# Altium PCB STM32H743IIT6.PcbDoc
Units mm, origin at the board's own origin, x right, y up, seen from the top; angles counter-clockwise.
Board outline 85.01 x 56 mm, 4 copper layers (Top Layer, Layer 2, Layer 3, Bottom Layer), stack 1.603 mm thick; 88 components, 0 nets, 618 pads, 4 vias.
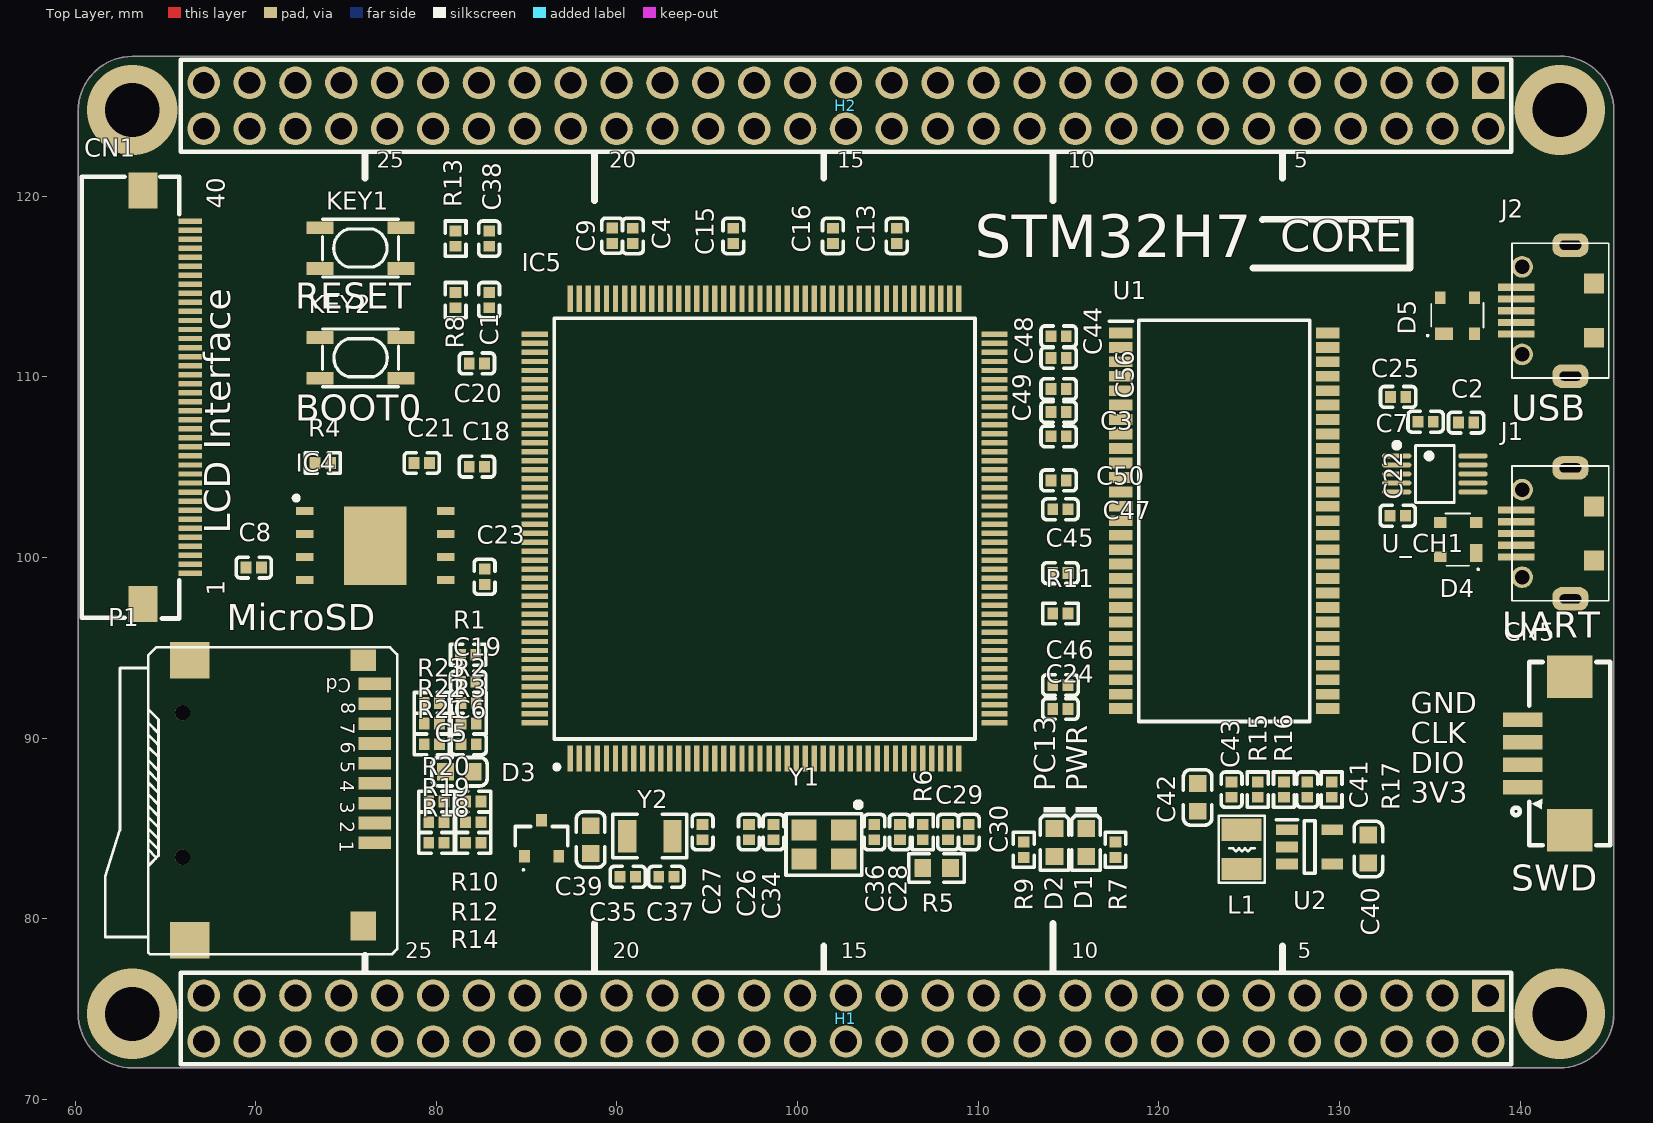
[diagram p0: Top Layer view]
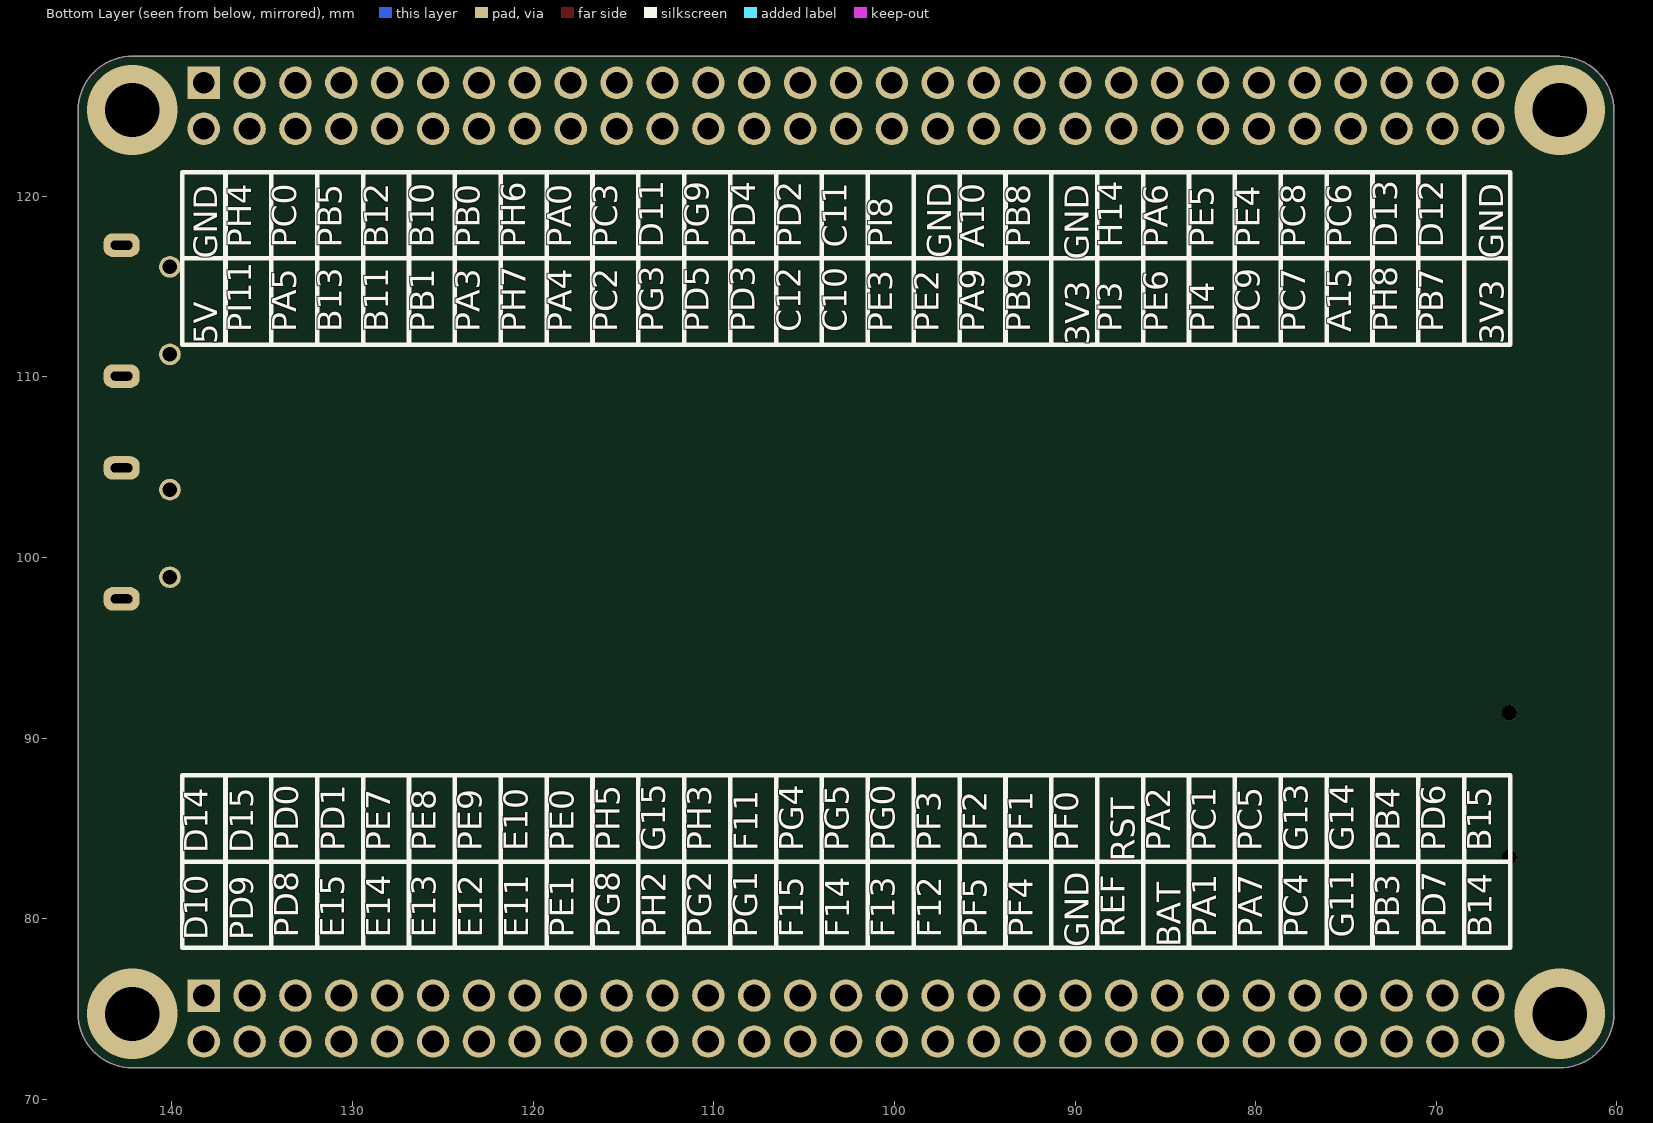
[diagram p1: Bottom Layer view, seen from below]
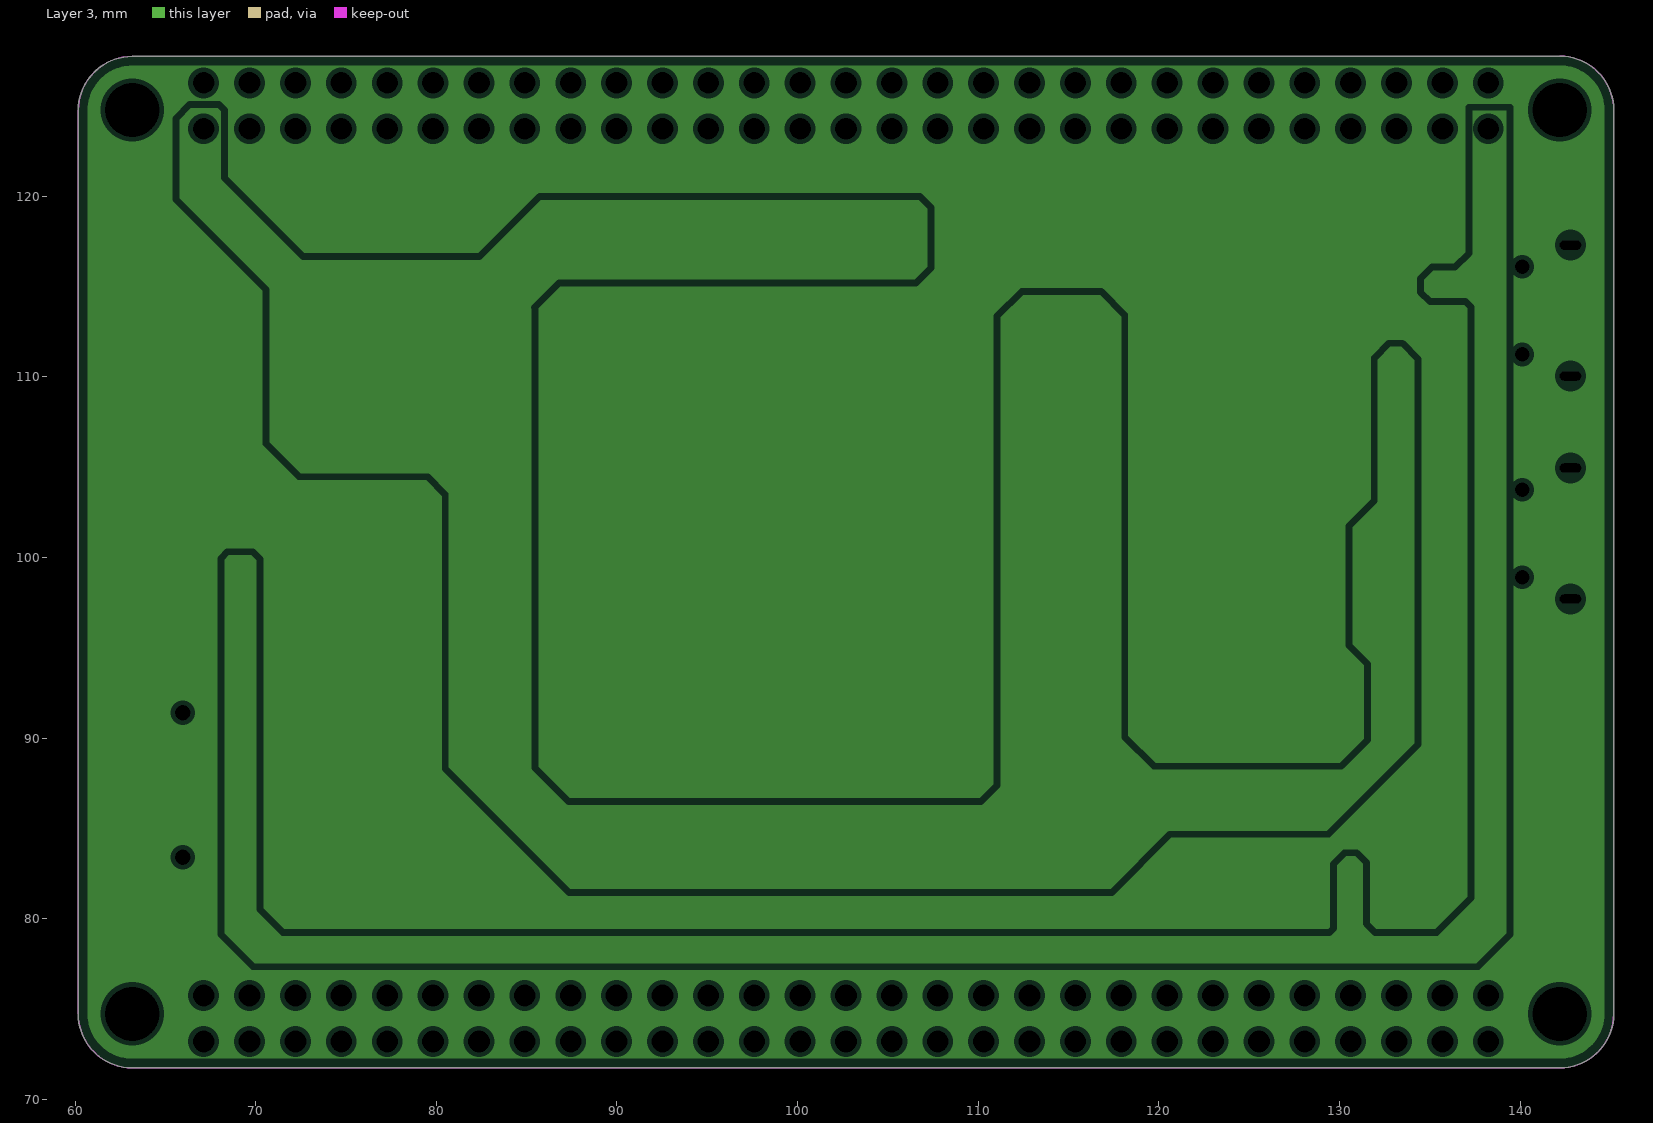
[diagram p2: Layer 3, clearances drawn from the general rule]

## Layer stack, top to bottom
Top Solder: solder mask 0.0102, Solder Resist, Dk 3.5
Top Layer: signal copper 0.0356
Dielectric 4: prepreg 0.0711, PP-006, Dk 4.1
Layer 2: signal copper 0.035
Dielectric 1: dielectric 1.32, FR-4, Dk 4.8
Layer 3: plane copper 0.035
Dielectric 3: prepreg 0.0711, PP-006, Dk 4.1
Bottom Layer: signal copper 0.0356
Bottom Solder: solder mask 0.0102, Solder Resist, Dk 3.5

## Board outline
63.167,71.746 cw(c63.165,74.737) 60.175,74.742 60.178,74.742 60.178,124.745 cw(c63.168,124.747) 63.173,127.737 142.195,127.737 142.195,127.75 cw(c142.196,124.76) 145.186,124.755 145.186,74.737 145.184,74.737 cw(c142.194,74.736) 142.189,71.745

## Design rules (kind name [scope] priority, off if disabled: settings)
Clearance Clearance_1 [InDifferentialPair('D')   OR InDifferentialPair('USB_FS')] p1: gap=0.152 ignorepadtopadclearanceinfootprint=TRUE except(0: Arc-Hole Track-Hole SMDPad-Hole THPad-Hole Via-Hole Fill-Hole Poly-Hole Region-Hole Text-Hole)
Clearance Clearance_2 [All vs OnLayer('GND')] p2: gap=0.102 ignorepadtopadclearanceinfootprint=TRUE except(0: Arc-Hole Track-Hole SMDPad-Hole THPad-Hole Via-Hole Fill-Hole Poly-Hole Region-Hole Text-Hole)
Clearance [All] p3: gap=0.178 ignorepadtopadclearanceinfootprint=TRUE except(0: Arc-Hole Track-Hole SMDPad-Hole THPad-Hole Via-Hole Fill-Hole Poly-Hole Region-Hole Text-Hole)
DiffPairsRouting [All] p1: maxlimit=0.152 minlimit=0.152 mostfreqgap=0.152 toplayer_minwidth=0.102 toplayer_maxwidth=0.152 toplayer_prefwidth=0.152 midlayer1_minwidth=0.102 midlayer1_maxwidth=0.152 midlayer1_prefwidth=0.152 bottomlayer_minwidth=0.102 bottomlayer_maxwidth=0.152 bottomlayer_prefwidth=0.152 maxuncoupledlength=10
HoleSize [All] p1: absolutevalues=TRUE maxlimit=10 minlimit=0.025 maxpercent=80.000 minpercent=20.000
HoleToHoleClearance [All] p1: gap=0 allowstackedmicrovias=TRUE
MinimumSolderMaskSliver [All] p1: minsoldermaskwidth=0
PlaneClearance [All] p1: clearance=0.254
PlaneConnect [All] p1: planeconnectstyle=Direct reliefexpansion=0.508 reliefentries=4 reliefconductorwidth=0.254 reliefairgap=0.254
PolygonConnect [All] p1: connectstyle=Direct reliefconductorwidth=0.254 reliefentries=4 polygonreliefangle="90 Angle" airgapwidth=0.254
RoutingVias [All] p1: holewidth=0.2 width=0.4 viastyle="Through Hole" minholewidth=0.2 minwidth=0.4 maxholewidth=10 maxwidth=10
SilkToSilkClearance [All] p1: silktosilkclearance=0
SilkToSolderMaskClearance [IsPad] p1: minsilkscreentomaskgap=0 clearancetoexposedcopper=TRUE
SolderMaskExpansion [All] p1: expansion=0.102 istentingtop=FALSE
Width [All] p1: maxlimit=2.54 minlimit=0.127 preferedwidth=0.127
22 further rules are at their usual default settings.

## Classes and differential pairs
differential pair USB_FS: +"" -""
differential pair D: +"" -""

## Components (designator, comment, footprint, x,y, rotation, side; value= is the part's Value field where it differs from the comment)
C1 "100nF" 0402_C 82.924,114.249 r90 top
C2 "100nF" 0402_C 137.008,107.467 r0 top
C3 "2.2uF" 0402_C 114.452,108.052 r180 top
C4 "2.2uF" 0402_C 90.881,117.798 r270 top
C5 "10uF" 0603_C 81.28,88.138 r0 top
C6 "100nF" 0402_C 81.788,89.662 r0 top
C7 "100nF" 0402_C 134.766,107.518 r0 top
C8 "100nF" 0402_C 69.894,99.441 r0 top
C9 "100nF" 0402_C 89.738,117.812 r270 top
C13 "100nF" 0402_C 105.486,117.798 r270 top
C15 "100nF" 0402_C 96.444,117.798 r270 top
C16 "100nF" 0402_C 101.956,117.798 r270 top
C18 "100nF" 0402_C 82.245,105.029 r0 top
C19 "100nF" 0402_C 81.763,93.116 r0 top
C20 "100nF" 0402_C 82.245,110.744 r0 top
C21 "100nF" 0402_C 79.197,105.232 r0 top
C22 "100nF" 0402_C 133.223,102.311 r0 top
C23 "100nF" 0402_C 82.677,98.933 r270 top
C24 "100nF" 0402_C 114.554,91.618 r180 top
C25 "100nF" 0402_C 133.248,108.89 r0 top
C26 "100nF" 0402_C 97.307,84.8 r270 top
C27 "100nF" 0402_C 94.742,84.8 r270 top
C28 "100nF" 0402_C 105.664,84.8 r270 top
C29 "2.2uF" 0402_C 108.331,84.8 r270 top
C30 "100nF" 0402_C 109.474,84.8 r270 top
C34 "12pF" 0402_C 98.661,84.8 r90 top
C35 "6pF" 0402_C 90.602,82.321 r180 top
C36 "12pF" 0402_C 104.249,84.8 r270 top
C37 "6pF" 0402_C 92.735,82.321 r0 top
C38 "100nF" 0402_C 82.924,117.65 r270 top
C39 "10uF" 0603_C 88.544,84.379 r90 top
C40 "±20%,murata,10V" 0603_C 131.597,83.863 r270 top
C41 "22pF,50V,0402" 0402_C 128.219,87.147 r90 top
C42 "10uF (106) 10% 10V" 0603_C 122.149,86.716 r270 top
C43 "100nF" 0402_C 124.028,87.147 r270 top
C44 "100nF" 0402_C 114.452,112.243 r0 top
C45 "100nF" 0402_C 114.554,99.136 r180 top
C46 "100nF" 0402_C 114.554,92.939 r180 top
C47 "100nF" 0402_C 114.554,102.667 r0 top
C48 "100nF" 0402_C 114.452,111.049 r0 top
C49 "100nF" 0402_C 114.452,109.322 r180 top
C50 "100nF" 0402_C 114.452,104.267 r180 top
C56 "100nF" 0402_C 114.452,106.705 r0 top
CN1 "FPC_40P" FPC-SMD_P0.50-40P_FGS-XJ-H2.0 65.07,108.871 r90 top
CN5 "HC-1.25-4PWT" SMD_4P-1.25 141.445,89.154 r90 top
D1 "黄灯 0603" 0603_LED_S1 115.976,84.218 r270 top
D2 "黄灯 0603" 0603_LED_S1 114.224,84.218 r270 top
D3 "BAT54C" BAT54C215 85.827,84.455 r0 top
D4 "PRTR5V0U2X" PRTR5V0U2X 136.576,100.99 r90 top
D5 "PRTR5V0U2X" PRTR5V0U2X 136.527,113.386 r0 top
H1 "2.54-2x29P" 2.54-2X29P 102.68,74.476 r180 top
H2 "2.54-2x29P" 2.54-2X29P 102.68,125.006 r180 top
IC4 "W25Q256JVEIQ_TR" WSON-8-EP 76.62,100.66 r0 top
IC5 "STM32H743IIT6" QFP50P2600X2600X160-176N 98.171,101.6 r90 top
J1 "USB_MICRO_DIP" MICRO_USB_5S 139.789,101.331 r90 top value=USB_micro
J2 "USB_MICRO_DIP" MICRO_USB_5S 139.789,113.665 r90 top value=USB_micro
KEY1 "KEY-SMD-324225" KEY-SOP324225 73.554,116.002 r180 top
KEY2 "KEY-SMD-324225" KEY-SOP324225 78.054,112.181 r0 top
L1 "DFE252010F-2R2M=P2,1008" INDC2520X10N 124.587,83.845 r90 top value=DFE252010F-2R2M=P2,1008
P1 "TF_Card_Holder" SD-MICRO-TF 76.581,84.203 r270 top
R1 "4.7KΩ" 0402_R 81.763,94.615 r180 top
R2 "4.7K" 0402_R 81.788,91.948 r0 top value=0Ω
R3 "4.7K" 0402_R 81.788,90.805 r0 top value=0Ω
R4 "4.7KΩ" 0402_R 73.711,105.232 r180 top
R5 "600Ω ±25% 100MHz" 0603_R 107.696,82.804 r180 top
R6 "Res" 0402_R 106.934,84.8 r90 top value=0Ω
R7 "4.7KΩ" 0402_R 117.602,83.82 r90 top
R8 "4.7KΩ" 0402_R 81.066,114.249 r90 top
R9 "4.7KΩ" 0402_R 112.522,83.82 r90 top
R10 "4.7K" 0402_R 82.042,86.487 r0 top value=0Ω
R11 "4.7KΩ (1002) ±1%" 0402_R 114.554,96.901 r180 top
R12 "4.7K" 0402_R 82.042,85.344 r0 top value=0Ω
R13 "4.7KΩ" 0402_R 81.066,117.65 r90 top
R14 "4.7K" 0402_R 82.042,84.201 r0 top value=0Ω
R15 "4.7KΩ" 0402_R 125.473,87.147 r90 top
R16 "100KΩ" 0402_R 126.924,87.147 r270 top
R17 "22.1KΩ" 0402_R 129.565,87.147 r90 top
R18 "33R" 0402_R 80.01,84.201 r0 top value=0Ω
R19 "33R" 0402_R 80.01,85.344 r0 top value=0Ω
R20 "33R" 0402_R 80.01,86.487 r0 top value=0Ω
R21 "33R" 0402_R 79.756,89.662 r0 top value=0Ω
R22 "33R" 0402_R 79.756,90.805 r0 top value=0Ω
R23 "33R" 0402_R 79.756,91.948 r0 top value=0Ω
U1 "W9825G6KH" TSOPII-54 123.622,102.032 r0 top
U2 "SM8082AAAC" SOT-23-5 128.346,83.972 r0 top value=SM8082AAAC,SOT-23-5
U_CH1 "CH340E" MSOP-10 135.28,104.623 r270 top
Y1 "25MHZ" SMD-3225_4P 101.455,84.112 r180 top
Y2 "32.768KHz" "SMD-3215_2P FC - 135" 91.821,84.575 r180 top

## Footprints (in the part's own frame and the unit in brackets; to place one, negate y for a bottom-side part, rotate by r counter-clockwise, add the part's x,y. Pads: shape width x height; smd on the part's side, far side on the other; paste and mask are expansions set on the pad)
2.54-2X29P [mm]
  rect 1.8x1.8 hole 1.2: 1(-35.56,-1.27)
  round 1.8 hole 1.2: 2(-33.02,-1.27) 3(-30.48,-1.27) 4(-27.94,-1.27) 5(-25.4,-1.27) 6(-22.86,-1.27) 7(-20.32,-1.27) 8(-17.78,-1.27) 9(-15.24,-1.27) 10(-12.7,-1.27) 11(-10.16,-1.27) 12(-7.62,-1.27) 13(-5.08,-1.27) 14(-2.54,-1.27) 15(0,-1.27) 16(2.54,-1.27) 17(5.08,-1.27) 18(7.62,-1.27) 19(10.16,-1.27) 20(12.7,-1.27) 21(15.24,-1.27) 22(17.78,-1.27) 23(20.32,-1.27) 24(22.86,-1.27) 25(25.4,-1.27) 26(27.94,-1.27) 27(30.48,-1.27) 28(33.02,-1.27) 29(35.56,-1.27) 30(35.56,1.27) 31(33.02,1.27) 32(30.48,1.27) 33(27.94,1.27) 34(25.4,1.27) 35(22.86,1.27) 36(20.32,1.27) 37(17.78,1.27) 38(15.24,1.27) 39(12.7,1.27) 40(10.16,1.27) 41(7.62,1.27) 42(5.08,1.27) 43(2.54,1.27) 44(0,1.27) 45(-2.54,1.27) 46(-5.08,1.27) 47(-7.62,1.27) 48(-10.16,1.27) 49(-12.7,1.27) 50(-15.24,1.27) 51(-17.78,1.27) 52(-20.32,1.27) 53(-22.86,1.27) 54(-25.4,1.27) 55(-27.94,1.27) 56(-30.48,1.27) 57(-33.02,1.27) 58(-35.56,1.27)
  silkscreen extent -36.83,-2.54 36.83,2.54
0402_C [mm]
  rect 0.6x0.65 smd mask+0.051: 1(-0.425,0) 2(0.425,0)
  silkscreen extent -0.97,-0.58 0.97,0.58, body extent -0.48,-0.3 0.52,0.3, height 0.2
0402_R [mm]
  rect 0.6x0.65 smd mask+0.051: 1(-0.425,0) 2(0.425,0)
  silkscreen extent -0.97,-0.58 0.97,0.58, body extent -0.57,-0.27 0.58,0.28, height 0.41
0603_C [mm]
  rect 0.93x0.98 smd: 1(-0.77,0) 2(0.77,0)
  silkscreen extent -1.53,-0.79 1.54,0.79, body extent -0.8,-0.4 0.8,0.4, height 0.3
0603_LED_S1 [mm]
  rect 0.93x0.98 smd: A(0.77,0) K(-0.77,0)
  silkscreen extent -1.98,-0.79 1.54,0.79, body extent -0.8,-0.4 0.8,0.4, height 0.6
0603_R [mm]
  rect 0.93x0.98 smd: 1(-0.77,0) 2(0.77,0)
  silkscreen extent -1.53,-0.79 1.54,0.79, body extent -0.85,-0.4 0.85,0.4, height 0.56
BAT54C215 [mm]
  rect 0.6x0.7 smd: 1(-0.95,-1) 2(0.95,-1) 3(0,1)
  silkscreen extent -1.45,-1.8 1.45,0.65, body extent -1.45,-1.2 1.45,1.2, height 0.95
FPC-SMD_P0.50-40P_FGS-XJ-H2.0 [mm]
  rect 0.3x1.3 smd paste+0 mask+0.05: 1(-9.75,-1.3) 2(-9.25,-1.3) 3(-8.75,-1.3) 4(-8.25,-1.3) 5(-7.75,-1.3) 6(-7.25,-1.3) 7(-6.75,-1.3) 8(-6.25,-1.3) 9(-5.75,-1.3) 10(-5.25,-1.3) 11(-4.75,-1.3) 12(-4.25,-1.3) 13(-3.75,-1.3) 14(-3.25,-1.3) 15(-2.75,-1.3) 16(-2.25,-1.3) 17(-1.75,-1.3) 18(-1.25,-1.3) 19(-0.75,-1.3) 20(-0.25,-1.3) 21(0.25,-1.3) 22(0.75,-1.3) 23(1.25,-1.3) 24(1.75,-1.3) 25(2.25,-1.3) 26(2.75,-1.3) 27(3.25,-1.3) 28(3.75,-1.3) 29(4.25,-1.3) 30(4.75,-1.3) 31(5.25,-1.3) 32(5.75,-1.3) 33(6.25,-1.3) 34(6.75,-1.3) 35(7.25,-1.3) 36(7.75,-1.3) 37(8.25,-1.3) 38(8.75,-1.3) 39(9.25,-1.3) 40(9.75,-1.3)
  rect 2x1.6 smd: 41(11.45,1.3) 42(-11.45,1.3)
  silkscreen extent -12.25,-0.7 12.2,4.7, body extent -12.03,-2.64 12.03,3.3, height 2.63
INDC2520X10N [mm]
  rect 1.23x2.22 smd: 1(-1.085,0) 2(1.085,0)
  Top Layer pour cut-out: -0.475,-1.225 -0.475,1.225 0.475,1.225 0.475,-1.225
  silkscreen extent -1.85,-1.27 1.85,1.27, body extent -1.35,-1.1 1.35,1.1, height 1
KEY-SOP324225 [mm]
  rect 1.5x0.7 smd: 1(-4.5,0) 1(0,0) 2(-4.5,-2.25) 2(0,-2.25)
  silkscreen extent -4.35,-2.73 -0.15,0.48, body extent -4.61,-2.74 0.09,0.46, height 2.51
MICRO_USB_5S [mm]
  rect 0.4x2 smd: 1(-1.3,0) 2(-0.65,0) 3(0,0) 4(0.65,0) 5(1.3,0)
  round 1.2 hole 0.8: 6(-2.425,-0.32) 7(2.425,-0.32)
  rrect77% 1.3x2 hole 0.5 slot 1.2 at 90 deg: 8(-3.625,-3) 9(3.625,-3)
  rect 1.1x1.1 smd: 10(-1.5,-4.31) 11(1.5,-4.31)
  silkscreen extent -3.73,-5.12 3.73,0.24, body extent -4,-5.33 4,0.27, height 2.85
MSOP-10 [mm]
  oval 0.28x1.62 smd: 1(-1,-2.11) 2(-0.5,-2.11) 3(0,-2.11) 4(0.5,-2.11) 5(1,-2.11) 6(1,2.11) 7(0.5,2.11) 8(0,2.11) 9(-0.5,2.11) 10(-1,2.11)
  silkscreen extent -1.74,-2.26 1.58,1.07, body extent -1.5,-2.5 1.5,2.5, height 1.1
PRTR5V0U2X [mm]
  rect 1x0.7 smd: 1(-0.75,-1)
  rect 0.6x0.7 smd: 2(0.95,-1) 3(0.95,1) 4(-0.95,1)
  silkscreen extent -1.7,-1.15 1.45,0.7, body extent -1.47,-1.2 1.43,1.2, height 0.95
QFP50P2600X2600X160-176N [mm]
  rect 1.45x0.3 smd: 1(-12.725,10.75) 2(-12.725,10.25) 3(-12.725,9.75) 4(-12.725,9.25) 5(-12.725,8.75) 6(-12.725,8.25) 7(-12.725,7.75) 8(-12.725,7.25) 9(-12.725,6.75) 10(-12.725,6.25) 11(-12.725,5.75) 12(-12.725,5.25) 13(-12.725,4.75) 14(-12.725,4.25) 15(-12.725,3.75) 16(-12.725,3.25) 17(-12.725,2.75) 18(-12.725,2.25) 19(-12.725,1.75) 20(-12.725,1.25) 21(-12.725,0.75) 22(-12.725,0.25) 23(-12.725,-0.25) 24(-12.725,-0.75) 25(-12.725,-1.25) 26(-12.725,-1.75) 27(-12.725,-2.25) 28(-12.725,-2.75) 29(-12.725,-3.25) 30(-12.725,-3.75) 31(-12.725,-4.25) 32(-12.725,-4.75) 33(-12.725,-5.25) 34(-12.725,-5.75) 35(-12.725,-6.25) 36(-12.725,-6.75) 37(-12.725,-7.25) 38(-12.725,-7.75) 39(-12.725,-8.25) 40(-12.725,-8.75) 41(-12.725,-9.25) 42(-12.725,-9.75) 43(-12.725,-10.25) 44(-12.725,-10.75) 89(12.725,-10.75) 90(12.725,-10.25) 91(12.725,-9.75) 92(12.725,-9.25) 93(12.725,-8.75) 94(12.725,-8.25) 95(12.725,-7.75) 96(12.725,-7.25) 97(12.725,-6.75) 98(12.725,-6.25) 99(12.725,-5.75) 100(12.725,-5.25) 101(12.725,-4.75) 102(12.725,-4.25) 103(12.725,-3.75) 104(12.725,-3.25) 105(12.725,-2.75) 106(12.725,-2.25) 107(12.725,-1.75) 108(12.725,-1.25) 109(12.725,-0.75) 110(12.725,-0.25) 111(12.725,0.25) 112(12.725,0.75) 113(12.725,1.25) 114(12.725,1.75) 115(12.725,2.25) 116(12.725,2.75) 117(12.725,3.25) 118(12.725,3.75) 119(12.725,4.25) 120(12.725,4.75) 121(12.725,5.25) 122(12.725,5.75) 123(12.725,6.25) 124(12.725,6.75) 125(12.725,7.25) 126(12.725,7.75) 127(12.725,8.25) 128(12.725,8.75) 129(12.725,9.25) 130(12.725,9.75) 131(12.725,10.25) 132(12.725,10.75)
  rect 0.3x1.45 smd: 45(-10.75,-12.725) 46(-10.25,-12.725) 47(-9.75,-12.725) 48(-9.25,-12.725) 49(-8.75,-12.725) 50(-8.25,-12.725) 51(-7.75,-12.725) 52(-7.25,-12.725) 53(-6.75,-12.725) 54(-6.25,-12.725) 55(-5.75,-12.725) 56(-5.25,-12.725) 57(-4.75,-12.725) 58(-4.25,-12.725) 59(-3.75,-12.725) 60(-3.25,-12.725) 61(-2.75,-12.725) 62(-2.25,-12.725) 63(-1.75,-12.725) 64(-1.25,-12.725) 65(-0.75,-12.725) 66(-0.25,-12.725) 67(0.25,-12.725) 68(0.75,-12.725) 69(1.25,-12.725) 70(1.75,-12.725) 71(2.25,-12.725) 72(2.75,-12.725) 73(3.25,-12.725) 74(3.75,-12.725) 75(4.25,-12.725) 76(4.75,-12.725) 77(5.25,-12.725) 78(5.75,-12.725) 79(6.25,-12.725) 80(6.75,-12.725) 81(7.25,-12.725) 82(7.75,-12.725) 83(8.25,-12.725) 84(8.75,-12.725) 85(9.25,-12.725) 86(9.75,-12.725) 87(10.25,-12.725) 88(10.75,-12.725) 133(10.75,12.725) 134(10.25,12.725) 135(9.75,12.725) 136(9.25,12.725) 137(8.75,12.725) 138(8.25,12.725) 139(7.75,12.725) 140(7.25,12.725) 141(6.75,12.725) 142(6.25,12.725) 143(5.75,12.725) 144(5.25,12.725) 145(4.75,12.725) 146(4.25,12.725) 147(3.75,12.725) 148(3.25,12.725) 149(2.75,12.725) 150(2.25,12.725) 151(1.75,12.725) 152(1.25,12.725) 153(0.75,12.725) 154(0.25,12.725) 155(-0.25,12.725) 156(-0.75,12.725) 157(-1.25,12.725) 158(-1.75,12.725) 159(-2.25,12.725) 160(-2.75,12.725) 161(-3.25,12.725) 162(-3.75,12.725) 163(-4.25,12.725) 164(-4.75,12.725) 165(-5.25,12.725) 166(-5.75,12.725) 167(-6.25,12.725) 168(-6.75,12.725) 169(-7.25,12.725) 170(-7.75,12.725) 171(-8.25,12.725) 172(-8.75,12.725) 173(-9.25,12.725) 174(-9.75,12.725) 175(-10.25,12.725) 176(-10.75,12.725)
  silkscreen extent -13.32,-11.65 11.65,11.65, body extent -13,-13 13,13, height 1.6
SD-MICRO-TF [mm]
  rect 2.032x2.2 smd: 0(-10.1,-10.227) 0(5.4,-10.227)
  rect 1.2x1.4 smd: 0(-10.1,-0.627)
  rect 1.6x1.4 smd: 0(4.6,-0.627)
  rect 0.7x1.8 smd: 1(0,0) 2(-1.1,0) 3(-2.2,0) 4(-3.3,0) 5(-4.4,0) 6(-5.5,0) 7(-6.6,0) 8(-7.7,0) 9(-8.8,0)
  round 0.85 hole 0.85 unplated: 10(-7.2,-10.627) 10(0.8,-10.627)
  silkscreen extent -10.82,-14.91 6.17,1.25, body extent -10.37,-14.85 5.9,0.34, height 1.8
"SMD-3215_2P FC - 135" [mm]
  rect 1x1.8 smd: 1(-1.25,0) 2(1.25,0)
  silkscreen extent -2.05,-1.2 2.05,1.2
SMD-3225_4P [mm]
  rect 1.4x1.15 smd: 1(-1.1,-0.8) 2(1.1,-0.8) 3(1.1,0.8) 4(-1.1,0.8)
  silkscreen extent -2.1,-2.35 2.1,1.7, body extent -1.6,-1.25 1.6,1.25, height 0.61
SMD_4P-1.25 [mil]
  rect 31.5x86.6 smd mask+1.97: 1(-73.8,51.2) 2(-24.6,51.2) 3(24.6,51.2) 4(73.8,51.2)
  rect 92.5x98.4 smd mask+1.97: 5(167.5,-51.2) 6(-167.5,-51.2)
  silkscreen extent -200,-140 199,74, body extent -196,-142 198,64, height 134
SOT-23-5 [mm]
  rect 1.2x0.6 smd: 1(-1.25,0.95) 2(-1.25,0) 3(-1.25,-0.95) 4(1.25,-0.95) 5(1.25,0.95)
  silkscreen extent -1.85,-1.45 0.3,1.5, body extent -1.4,-1.45 1.4,1.45, height 1.2
TSOPII-54 [mm]
  rect 1.295x0.6 smd: 1(-5.728,10.4) 2(-5.728,9.6) 3(-5.728,8.8) 4(-5.728,8) 5(-5.728,7.2) 6(-5.728,6.4) 7(-5.728,5.6) 8(-5.728,4.8) 9(-5.728,4) 10(-5.728,3.2) 11(-5.728,2.4) 12(-5.728,1.6) 13(-5.728,0.8) 14(-5.728,0) 15(-5.728,-0.8) 16(-5.728,-1.6) 17(-5.728,-2.4) 18(-5.728,-3.2) 19(-5.728,-4) 20(-5.728,-4.8) 21(-5.728,-5.6) 22(-5.728,-6.4) 23(-5.728,-7.2) 24(-5.728,-8) 25(-5.728,-8.8) 26(-5.728,-9.6) 27(-5.728,-10.4) 28(5.728,-10.4) 29(5.728,-9.6) 30(5.728,-8.8) 31(5.728,-8) 32(5.728,-7.2) 33(5.728,-6.4) 34(5.728,-5.6) 35(5.728,-4.8) 36(5.728,-4) 37(5.728,-3.2) 38(5.728,-2.4) 39(5.728,-1.6) 40(5.728,-0.8) 41(5.728,0) 42(5.728,0.8) 43(5.728,1.6) 44(5.728,2.4) 45(5.728,3.2) 46(5.728,4) 47(5.728,4.8) 48(5.728,5.6) 49(5.728,6.4) 50(5.728,7.2) 51(5.728,8) 52(5.728,8.8) 53(5.728,9.6) 54(5.728,10.4)
  silkscreen extent -6.38,-11.11 4.73,11.11, body extent -5.88,-11.11 5.88,11.11, height 1.2
WSON-8-EP [mm]
  rect 0.95x0.45 smd: 1(-3.9,1.905) 2(-3.9,0.635) 3(-3.9,-0.635) 4(-3.9,-1.905) 5(3.9,-1.905) 6(3.9,-0.635) 7(3.9,0.635) 8(3.9,1.905)
  rect 3.45x4.35 smd: 9(0,0)
  silkscreen extent -4.5,2.51 -4.25,2.75, body extent -4.05,-3 4.05,3, height 0.8

## Part data
C1 C3 C4 C13 C15 C16 C18 C19 C20 C22 C23 C24 C25 C26 C27 C28 C29 C30 C38 C43 C44 C45 C46 C47 C48 C49 C50 C56: library part "0402 100nF (104) 10% 16V", "贴片电容", Package=0402, SuppliersPartNumber=C1525, ComponentLink1Description=供应商链接, ComponentLink1URL=http://www.szlcsc.com/product/details_1877.html, Supplier=LC
C2 C7 C9 C21: library part Cap, "贴片电容", Package=0402, SuppliersPartNumber=C1523, ComponentLink1Description=供应商链接, ComponentLink1URL=http://www.szlcsc.com/product/details_1875.html, Supplier=LC
C5 C6 C8: library part Cap, "25v", Package=0402, SuppliersPartNumber=C1523, ComponentLink1Description=供应商链接, ComponentLink1URL=http://www.szlcsc.com/product/details_1875.html, Supplier=LC
C34 C36: library part "0402 20pF (200) 5% 50V", "贴片电容", Package=0402, SuppliersPartNumber=C1554, ComponentLink1Description=供应商链接, ComponentLink1URL=http://www.szlcsc.com/product/details_1906.html, Supplier=LC
C35 C37: library part "0402 10pF (100) 5% 50V", "贴片电容", Package=0402, SuppliersPartNumber=C32949, ComponentLink1Description=供应商链接, ComponentLink1URL=http://www.szlcsc.com/product/details_33914.html, Supplier=LC
C39: library part "0603 4.7uF (475) 10% 16V", "贴片电容", Package=0603, SuppliersPartNumber=C19666, ComponentLink1Description=供应商链接, ComponentLink1URL=http://www.szlcsc.com/product/details_20375.html, Supplier=LC
C40: library part 02.01.00530, "GRM158R61A226ME15D,10V,22uF,±20%,X5R,0402,murata", ComponentLink1Description=ErpDataInfo, ComponentLink1URL=http://doc2/webdisk/物料资料/物料资料/02/01/00/530/数据手册, PCB备注=201020CZY, 厂商=MURATA, 名称=电容, 器件优选方案=通用物料, 型号=22uF,±20%,X5R,10V, 封装=0603, 物料代码=02.01.00530, 环保状态=RoHS2.0, 生产单位=PCS, 贴片和直插=SMT
C41: library part 02.01.00290, "GRM1555C1H220JA01D,0402,MURATA,22pF,C0G,±5%,50V,", ComponentLink1Description=ErpDataInfo, ComponentLink1URL=http://doc2/webdisk/物料资料/物料资料/02/01/00/290/数据手册, 名称=电容, 器件优选方案=通用物料, 型号=22pF,C0G,±5%,50V, 封装=0402, 旧物料代码=1.02.17.0036, 物料代码=02.01.00290, 环保状态=RoHS2.0+REACH, 生产单位=PCS, 贴片和直插=SMT
C42: library part "0603 10uF (106) 10% 10V", "贴片电容", Package=0603, SuppliersPartNumber=C19702, ComponentLink1Description=供应商链接, ComponentLink1URL=http://www.szlcsc.com/product/details_20411.html, Supplier=LC
CN5: library part 4P-1.25, Current Rating (Max)=1A, JLCPCB Part Class="Extended Part", LCSC Part Name="4P 卧贴 间距P=1.25mm", Manufacturer=HCTL(华灿天禄), Operating Temperature Range=-25℃~+85℃, Add into BOM=yes, Convert to PCB=yes, Datasheet=https://atta.szlcsc.com/upload/public/pdf/source/20210728/C2845379_48B7DC28A4B35DB030A7253F7C3FD974.pdf, Device=HC-1.25-4PWT, Gender=公型插针, Manufacturer Part=HC-1.25-4PWT, Mounting Style=卧贴, Name=HC-1.25-4PWT, Number of PINs Per Row=4, Number of Rows=1, Pins Structure=1x4P, Pitch=1.25mm, Reference Series=-, Row Spacing=-, Supplier=LCSC, Supplier Footprint=SMD,P=1.25mm, Supplier Part=C2845381, Symbol=HC-1.25-4PWT
D1 D2: library part "0603 黄灯", "发光二极管", Package=0603, SuppliersPartNumber=C72038, ComponentLink1Description=供应商链接, ComponentLink1URL=http://www.szlcsc.com/product/details_73147.html, Supplier=LC
D3: "双肖特基二极管"
D4 D5: "Diode", Manufacturer_Name=Nexperia, Mouser Part Number=N/A, Datasheet Link=https://assets.nexperia.com/documents/data-sheet/PRTR5V0U2X.pdf, Height=1.1mm, Manufacturer_Part_Number=PRTR5V0U2X, Mouser Price/Stock=https://www.mouser.co.uk/ProductDetail/Nexperia/PRTR5V0U2X?qs=vHuUswq2%252BsxqVTVM0kNyWw%3D%3D
H1 H2: JLCPCB Part Class="Extended Part", LCSC Part Name="1.27mm 2x50P", Manufacturer=BOOMELE(博穆精密), Manufacturer Part=1.27-2*50P母, Add into BOM=yes, Contact Material=-, Contact Plating=-, Convert to PCB=yes, Datasheet=https://atta.szlcsc.com/upload/public/pdf/source/20140331/1457707039185.pdf, Device=1.27-2*50P母, Holes Structure=2x50P, Insulation Height=-, Mounting Type=直插, Name=1.27-2*50P母, Number of Holes=100, Number of Rows=2, Pitch=1.27mm, Row Spacing=1.27mm, Supplier=LCSC, Supplier Footprint=直插,P=1.27mm, Supplier Part=C24905, Symbol=1.27mm2x50P
IC4: "Integrated Circuit", Arrow Part Number="W25Q256JVEIQ TR", Manufacturer_Name=Winbond, Mouser Part Number=454-W25Q256JVEIQTR, Arrow Price/Stock=https://www.arrow.com/en/products/w25q256jveiqtr/winbond-electronics?region=nac, Datasheet Link=http://www.winbond.com/resource-files/w25q256jv%20spi%20reve%2002102017.pdf, Height=0.8mm, Manufacturer_Part_Number="W25Q256JVEIQ TR", Mouser Price/Stock=https://www.mouser.co.uk/ProductDetail/Winbond/W25Q256JVEIQ-TR?qs=qSfuJ%252Bfl%2Fd4d16629NnShw%3D%3D
IC5: "Integrated Circuit", Manufacturer_Name=STMicroelectronics, Mouser Part Number=511-STM32H743IIT6, Arrow Part Number=STM32H743IIT6, Arrow Price/Stock=https://www.arrow.com/en/products/stm32h743iit6/stmicroelectronics?region=nac, Datasheet Link=https://componentsearchengine.com/Datasheets/1/STM32H743IIT6.pdf, Height=1.6mm, Manufacturer_Part_Number=STM32H743IIT6, Mouser Price/Stock=https://www.mouser.co.uk/ProductDetail/STMicroelectronics/STM32H743IIT6?qs=FNcb6ahWXRzE163cq8Rfjg%3D%3D
KEY1 KEY2: "KEY,SMD,324225"
L1: library part INDUCTOR1, "DFE252010F-2R2M=P2,1008,MURATA,2.2μH,±20%,2300mA,97mΩ,", ComponentLink1Description=ErpDataInfo, ComponentLink1URL=http://doc2/webdisk/物料资料/物料资料/03/01/00/528/数据手册, PCB备注=190613hcj, 厂商=MURATA, 名称=电感, 器件优选方案=通用物料, 型号=2.2μH,±20%,2300mA,97mΩ, 封装=SMT, 物料代码=03.01.00528, 环保状态=RoHS2.0+REACH, 生产单位=PCS, 贴片和直插=SMT
P1: library part TF_Card
R1: library part "0603 4.7KΩ (4701) 1%", "贴片电阻", Package=0603, SuppliersPartNumber=C23162, ComponentLink1Description=供应商链接, ComponentLink1URL=http://www.szlcsc.com/product/details_23889.html, Supplier=LC
R2 R3 R10 R12 R14 R18 R19 R20 R21 R22 R23: library part Res, "贴片电阻", Package=0402, SuppliersPartNumber=C17168, ComponentLink1Description=供应商链接, ComponentLink1URL=http://www.szlcsc.com/product/details_17853.html, Supplier=LC
R4 R7 R9 R16 R17: library part "0402 4.7KΩ (4701) 1%", "贴片电阻", Package=0402, SuppliersPartNumber=C25900, ComponentLink1Description=供应商链接, ComponentLink1URL=http://www.szlcsc.com/product/details_26643.html, Supplier=LC
R5: library part "0603 100Ω (1000) 1%", "贴片电阻", Package=0603, SuppliersPartNumber=C22775, ComponentLink1Description=供应商链接, ComponentLink1URL=http://www.szlcsc.com/product/details_23502.html, Supplier=LC
R6: "贴片电阻", Package=0402, SuppliersPartNumber=C17168, ComponentLink1Description=供应商链接, ComponentLink1URL=http://www.szlcsc.com/product/details_17853.html, Supplier=LC
R8 R11 R13 R15: library part "0402 10KΩ (1002) 1%", "贴片电阻", Package=0402, SuppliersPartNumber=C25744, ComponentLink1Description=供应商链接, ComponentLink1URL=http://www.szlcsc.com/product/details_26487.html, Supplier=LC
U1: "WINBOND SDRAM"
U2: "SM8082AAAC,SOT-23-5,Silergy", ComponentLink1Description=ErpDataInfo, ComponentLink1URL=http://doc2/webdisk/物料资料/物料资料/08/09/03/789/数据手册, PCB备注=210201CZY, 厂商=Silergy, 名称=集成电路, 器件优选方案=通用物料, 型号=SM8082AAAC,SOT-23-5,Silergy, 封装=SOT-23-5, 物料代码=08.09.03789, 环保状态=RoHS2.0, 生产单位=PCS, 贴片和直插=SMT
Y1: library part "SMD-3225_4P  16MHZ 9PF 10PPM", "贴片晶振", Package=SMD-3225_4P, SuppliersPartNumber=C13738, ComponentLink1Description=供应商链接, ComponentLink1URL=http://www.szlcsc.com/product/details_14393.html, Supplier=LC
Y2: library part "SMD-3215_2P 32.768KHz 20ppm 12.5pF", "贴片晶振", Package=SMD-3215_2P, SuppliersPartNumber=C32346, ComponentLink1Description=供应商链接, ComponentLink1URL=http://www.szlcsc.com/product/details_33310.html, Supplier=LC
J1 J2: PCB DECAL=MICRO_USB_5S

## Via types
v1: diameter 5, hole 3, Top Layer to Bottom Layer, 4 vias

## Nets (pads, with @x,y where several pads share a name; then routed paths per layer and width w, separated by ;. In a path a pad name is that pad's centre, name@x,y a point inside that pad or via, vN(x,y) a via of type N, cw(c..) or ccw(c..) an arc to the next point about the centre after c; other vN are vias at no path point)
pads on no net: C1.1 C1.2 C2.1 C2.2 C3.1 C3.2 C4.1 C4.2 C5.1 C5.2 C6.1 C6.2 C7.1 C7.2 C8.1 C8.2 C9.1 C9.2 C13.1 C13.2 C15.1 C15.2 C16.1 C16.2 C18.1 C18.2 C19.1 C19.2 C20.1 C20.2 C21.1 C21.2 C22.1 C22.2 C23.1 C23.2 C24.1 C24.2 C25.1 C25.2 C26.1 C26.2 C27.1 C27.2 C28.1 C28.2 C29.1 C29.2 C30.1 C30.2 C34.1 C34.2 C35.1 C35.2 C36.1 C36.2 C37.1 C37.2 C38.1 C38.2 C39.1 C39.2 C40.1 C40.2 C41.1 C41.2 C42.1 C42.2 C43.1 C43.2 C44.1 C44.2 C45.1 C45.2 C46.1 C46.2 C47.1 C47.2 C48.1 C48.2 C49.1 C49.2 C50.1 C50.2 C56.1 C56.2 CN1.1 CN1.2 CN1.3 CN1.4 CN1.5 CN1.6 CN1.7 CN1.8 CN1.9 CN1.10 CN1.11 CN1.12 CN1.13 CN1.14 CN1.15 CN1.16 CN1.17 CN1.18 CN1.19 CN1.20 CN1.21 CN1.22 CN1.23 CN1.24 CN1.25 CN1.26 CN1.27 CN1.28 CN1.29 CN1.30 CN1.31 CN1.32 CN1.33 CN1.34 CN1.35 CN1.36 CN1.37 CN1.38 CN1.39 CN1.40 CN1.41 CN1.42 CN5.1 CN5.2 CN5.3 CN5.4 CN5.5 CN5.6 D1.A D1.K D2.A D2.K D3.1 D3.2 D3.3 D4.1 D4.2 D4.3 D4.4 D5.1 D5.2 D5.3 D5.4 H1.1 H1.2 H1.3 H1.4 H1.5 H1.6 H1.7 H1.8 H1.9 H1.10 H1.11 H1.12 H1.13 H1.14 H1.15 H1.16 H1.17 H1.18 H1.19 H1.20 H1.21 H1.22 H1.23 H1.24 H1.25 H1.26 H1.27 H1.28 H1.29 H1.30 H1.31 H1.32 H1.33 H1.34 H1.35 H1.36 H1.37 H1.38 H1.39 H1.40 H1.41 H1.42 H1.43 H1.44 H1.45 H1.46 H1.47 H1.48 H1.49 H1.50 H1.51 H1.52 H1.53 H1.54 H1.55 H1.56 H1.57 H1.58 H2.1 H2.2 H2.3 H2.4 H2.5 H2.6 H2.7 H2.8 H2.9 H2.10 H2.11 H2.12 H2.13 H2.14 H2.15 H2.16 H2.17 H2.18 H2.19 H2.20 H2.21 H2.22 H2.23 H2.24 H2.25 H2.26 H2.27 H2.28 H2.29 H2.30 H2.31 H2.32 H2.33 H2.34 H2.35 H2.36 H2.37 H2.38 H2.39 H2.40 H2.41 H2.42 H2.43 H2.44 H2.45 H2.46 H2.47 H2.48 H2.49 H2.50 H2.51 H2.52 H2.53 H2.54 H2.55 H2.56 H2.57 H2.58 IC4.1 IC4.2 IC4.3 IC4.4 IC4.5 IC4.6 IC4.7 IC4.8 IC4.9 IC5.1 IC5.2 IC5.3 IC5.4 IC5.5 IC5.6 IC5.7 IC5.8 IC5.9 IC5.10 IC5.11 IC5.12 IC5.13 IC5.14 IC5.15 IC5.16 IC5.17 IC5.18 IC5.19 IC5.20 IC5.21 IC5.22 IC5.23 IC5.24 IC5.25 IC5.26 IC5.27 IC5.28 IC5.29 IC5.30 IC5.31 IC5.32 IC5.33 IC5.34 IC5.35 IC5.36 IC5.37 IC5.38 IC5.39 IC5.40 IC5.41 IC5.42 IC5.43 IC5.44 IC5.45 IC5.46 IC5.47 IC5.48 IC5.49 IC5.50 IC5.51 IC5.52 IC5.53 IC5.54 IC5.55 IC5.56 IC5.57 IC5.58 IC5.59 IC5.60 IC5.61 IC5.62 IC5.63 IC5.64 IC5.65 IC5.66 IC5.67 IC5.68 IC5.69 IC5.70 IC5.71 IC5.72 IC5.73 IC5.74 IC5.75 IC5.76 IC5.77 IC5.78 IC5.79 IC5.80 IC5.81 IC5.82 IC5.83 IC5.84 IC5.85 IC5.86 IC5.87 IC5.88 IC5.89 IC5.90 IC5.91 IC5.92 IC5.93 IC5.94 IC5.95 IC5.96 IC5.97 IC5.98 IC5.99 IC5.100 IC5.101 IC5.102 IC5.103 IC5.104 IC5.105 IC5.106 IC5.107 IC5.108 IC5.109 IC5.110 IC5.111 IC5.112 IC5.113 IC5.114 IC5.115 IC5.116 IC5.117 IC5.118 IC5.119 IC5.120 IC5.121 IC5.122 IC5.123 IC5.124 IC5.125 IC5.126 IC5.127 IC5.128 IC5.129 IC5.130 IC5.131 IC5.132 IC5.133 IC5.134 IC5.135 IC5.136 IC5.137 IC5.138 IC5.139 IC5.140 IC5.141 IC5.142 IC5.143 IC5.144 IC5.145 IC5.146 IC5.147 IC5.148 IC5.149 IC5.150 IC5.151 IC5.152 IC5.153 IC5.154 IC5.155 IC5.156 IC5.157 IC5.158 IC5.159 IC5.160 IC5.161 IC5.162 IC5.163 IC5.164 IC5.165 IC5.166 IC5.167 IC5.168 IC5.169 IC5.170 IC5.171 IC5.172 IC5.173 IC5.174 IC5.175 IC5.176 J1.1 J1.2 J1.3 J1.4 J1.5 J1.6 J1.7 J1.8 J1.9 J1.10 J1.11 J2.1 J2.2 J2.3 J2.4 J2.5 J2.6 J2.7 J2.8 J2.9 J2.10 J2.11 KEY1.1 KEY1.2 KEY2.1 KEY2.2 L1.1 L1.2 P1.0 P1.1 P1.2 P1.3 P1.4 P1.5 P1.6 P1.7 P1.8 P1.9 P1.10 R1.1 R1.2 R2.1 R2.2 R3.1 R3.2 R4.1 R4.2 R5.1 R5.2 R6.1 R6.2 R7.1 R7.2 R8.1 R8.2 R9.1 R9.2 R10.1 R10.2 R11.1 R11.2 R12.1 R12.2 R13.1 R13.2 R14.1 R14.2 R15.1 R15.2 R16.1 R16.2 R17.1 R17.2 R18.1 R18.2 R19.1 R19.2 R20.1 R20.2 R21.1 R21.2 R22.1 R22.2 R23.1 R23.2 U1.1 U1.2 U1.3 U1.4 U1.5 U1.6 U1.7 U1.8 U1.9 U1.10 U1.11 U1.12 U1.13 U1.14 U1.15 U1.16 U1.17 U1.18 U1.19 U1.20 U1.21 U1.22 U1.23 U1.24 U1.25 U1.26 U1.27 U1.28 U1.29 U1.30 U1.31 U1.32 U1.33 U1.34 U1.35 U1.36 U1.37 U1.38 U1.39 U1.40 U1.41 U1.42 U1.43 U1.44 U1.45 U1.46 U1.47 U1.48 U1.49 U1.50 U1.51 U1.52 U1.53 U1.54 U2.1 U2.2 U2.3 U2.4 U2.5 U_CH1.1 U_CH1.2 U_CH1.3 U_CH1.4 U_CH1.5 U_CH1.6 U_CH1.7 U_CH1.8 U_CH1.9 U_CH1.10 Y1.1 Y1.2 Y1.3 Y1.4 Y2.1 Y2.2
copper on no net:
  other v1: 63.165,74.735 142.194,74.735 63.165,124.769 142.194,124.769

## Polygon pours and split planes (outlines as drawn)
no net on Layer 3 (split plane): 142.412,127.233 142.627,127.205 142.838,127.158 143.045,127.093 143.245,127.01 143.437,126.91 143.62,126.793 143.791,126.662 143.951,126.515 144.097,126.356 144.229,126.184 144.346,126.001 144.446,125.809 144.528,125.609 144.594,125.403 144.64,125.191 144.669,124.976 144.678,124.773 144.676,124.755 144.676,74.758 144.674,74.737 144.675,74.721 144.667,74.519 144.638,74.305 144.591,74.093 144.526,73.887 144.444,73.687 144.344,73.495 144.227,73.312 144.095,73.14 143.949,72.981 143.789,72.834 143.618,72.702 143.435,72.586 143.243,72.486 143.043,72.403 142.836,72.338 142.625,72.291 142.41,72.263 142.207,72.254 142.189,72.256 63.167,72.257 63.15,72.255 62.949,72.264 62.734,72.292 62.523,72.339 62.317,72.404 62.116,72.487 61.924,72.587 61.742,72.703 61.57,72.835 61.41,72.982 61.264,73.141 61.132,73.313 61.016,73.496 60.916,73.688 60.833,73.888 60.768,74.094 60.721,74.306 60.693,74.52 60.685,74.708 60.688,74.742 60.688,124.745 60.686,124.762 60.695,124.963 60.723,125.178 60.77,125.389 60.835,125.595 60.918,125.795 61.018,125.988 61.135,126.17 61.266,126.342 61.413,126.502 61.572,126.648 61.744,126.78 61.927,126.896 62.119,126.996 62.319,127.079 62.525,127.144 62.737,127.191 62.951,127.219 63.155,127.228 63.173,127.226 142.195,127.226 142.246,127.231 142.294,127.236 142.299,127.238
no net on Layer 3 (split plane): 139.254,124.714 139.254,79.201 137.588,77.535 69.93,77.535 68.264,79.201 68.264,99.568 68.264,99.869 68.522,100.127 69.74,100.127 70.039,99.828 70.039,97.155 70.039,80.518 70.045,80.468 70.057,80.441 70.065,80.422 70.095,80.382 71.365,79.112 71.405,79.082 71.451,79.062 71.501,79.056 129.457,79.056 129.507,79.062 129.534,79.074 129.553,79.082 129.593,79.112 129.803,79.322 129.833,79.362 129.841,79.381 129.853,79.408 129.859,79.458 129.859,82.961 130.356,83.458 130.88,83.458 131.306,83.032 131.306,79.722 131.312,79.672 131.323,79.645 131.331,79.626 131.362,79.586 131.836,79.112 131.876,79.082 131.922,79.062 131.972,79.056 135.382,79.056 135.432,79.062 135.459,79.074 135.478,79.082 135.518,79.112 137.423,81.017 137.453,81.057 137.473,81.103 137.473,81.109 137.479,81.153 137.479,113.86 137.473,113.91 137.461,113.937 137.453,113.956 137.423,113.996 137.11,114.309 137.07,114.339 137.051,114.347 137.024,114.359 136.974,114.365 135.081,114.365 134.685,114.761 134.685,115.363 135.208,115.886 136.398,115.886 136.448,115.892 136.475,115.904 136.494,115.912 136.534,115.942 137.296,116.704 137.326,116.744 137.334,116.763 137.346,116.79 137.352,116.84 137.352,124.735 139.254,124.735
no net on Layer 3 (split plane): 68.083,124.685 68.083,121.006 68.09,120.956 68.101,120.929 68.109,120.91 68.139,120.87 72.483,116.526 72.523,116.496 72.569,116.477 72.619,116.47 82.398,116.47 82.447,116.477 82.474,116.488 82.494,116.496 82.533,116.526 85.805,119.797 106.702,119.797 107.199,119.3 107.199,116.095 106.486,115.381 86.792,115.381 86.742,115.375 86.696,115.355 86.656,115.325 85.31,113.979 85.279,113.939 85.26,113.893 85.253,113.843 85.26,113.793 85.279,113.748 85.279,88.341 85.285,88.291 85.297,88.264 85.305,88.245 85.335,88.205 87.189,86.351 87.229,86.321 87.248,86.313 87.275,86.301 87.325,86.295 110.16,86.295 110.21,86.301 110.237,86.313 110.256,86.321 110.296,86.351 111.185,87.24 111.215,87.28 111.234,87.326 111.241,87.376 111.241,113.288 112.493,114.54 116.735,114.54 117.918,113.357 117.918,90.068 117.924,90.019 117.936,89.992 117.944,89.972 117.974,89.933 119.6,88.307 119.64,88.276 119.686,88.257 119.736,88.251 130.099,88.251 130.149,88.257 130.176,88.268 130.195,88.276 130.235,88.307 131.682,89.755 131.713,89.795 131.721,89.814 131.732,89.841 131.739,89.891 131.739,94.107 131.732,94.157 131.713,94.203 131.682,94.243 130.723,95.203 130.723,101.673 132.063,103.014 132.094,103.053 132.113,103.1 132.12,103.149 132.12,110.969 132.82,111.669 133.397,111.669 134.148,110.918 134.148,89.716 129.303,84.871 120.62,84.871 120.57,84.864 120.523,84.845 120.484,84.814 117.319,81.65 87.43,81.65 80.685,88.395 80.685,103.48 80.678,103.529 80.659,103.576 80.628,103.615 79.638,104.606 79.598,104.637 79.579,104.645 79.552,104.656 79.502,104.662 72.47,104.662 70.753,106.379 70.753,112.268 70.753,114.249 70.753,114.833 70.747,114.883 70.728,114.929 70.697,114.969 65.775,119.891 65.775,124.228 66.424,124.877 67.891,124.877

## Keep-outs
Keep-Out Layer:
  lines w0.025: 63.167,71.745 142.189,71.745 ccw(c142.194,74.736) 145.184,74.737 145.186,74.737 145.186,124.755 ccw(c142.196,124.76) 142.195,127.75 ; 63.167,71.746 cw(c63.165,74.737) 60.175,74.742 60.178,74.742 60.178,124.745 cw(c63.168,124.747) 63.173,127.737 142.195,127.737

## Other copper
Layer 3 (plane layer: these items are gaps in the copper):
  lines w0.381: 85.446,113.843 86.792,115.189 106.565,115.189 107.391,116.015 107.391,119.38 106.782,119.99 106.706,119.99 85.725,119.99 82.398,116.662 72.974,116.662 72.619,116.662 68.275,121.006 68.275,124.765 67.97,125.07 66.345,125.07 65.583,124.308 65.583,119.812 70.561,114.833 70.561,114.249 70.561,112.268 70.561,106.299 72.39,104.47 79.502,104.47 80.493,103.48 80.493,88.316 87.351,81.458 117.399,81.458 120.62,84.679 129.383,84.679 134.341,89.637 134.341,110.998 133.477,111.862 132.74,111.862 131.928,111.049 131.928,103.149 130.531,101.752 130.531,95.123 131.547,94.107 131.547,89.891 130.099,88.443 129.413,88.443 119.736,88.443 118.11,90.068 118.11,113.436 116.815,114.732 112.413,114.732 111.049,113.367 111.049,87.376 110.16,86.487 87.325,86.487 85.471,88.341 85.471,113.843 ; 68.072,79.121 68.072,99.568 68.072,99.949 68.442,100.319 69.819,100.319 70.231,99.908 70.231,97.155 70.231,80.518 71.501,79.248 127.762,79.248 129.457,79.248 129.667,79.458 129.667,83.041 130.277,83.65 130.959,83.65 131.498,83.112 131.498,79.722 131.972,79.248 135.382,79.248 137.287,81.153 137.287,113.86 136.974,114.173 135.001,114.173 134.493,114.681 134.493,115.443 135.128,116.078 136.398,116.078 137.16,116.84 137.16,124.927 139.446,124.927 139.446,124.714 139.446,79.121 137.668,77.343 69.85,77.343 68.072,79.121

## Silkscreen, mask and mechanical layers (free items; w line width, h text height)
Top Overlay:
  lines w0.381: 76.048,77.114 76.048,77.978 ; 76.048,120.996 76.048,122.368 76.048,121.504 ; 88.748,77.114 88.748,79.731 ; 88.748,119.752 88.748,122.368 ; 101.448,77.978 101.448,77.114 101.448,78.486 ; 101.448,120.996 101.448,122.368 101.448,121.504 ; 114.148,77.114 114.148,79.731 ; 114.148,119.752 114.148,122.368 ; 125.222,116.027 133.915,116.027 133.915,118.724 125.76,118.724 125.73,118.694 ; 126.848,77.114 126.848,78.486 ; 126.848,120.996 126.848,122.368 126.848,121.504
  text "25" at 76.696,121.274 h1.5
  text "20" at 89.574,121.274 h1.5
  text "15" at 102.198,121.274 h1.5
  text "10" at 114.949,121.274 h1.5
  text "5" at 127.496,121.274 h1.5
  text "40" at 68.301,119.304 h1 r90
  text "CORE" at 126.733,116.344 h3
  text "STM32H7" at 109.809,115.847 h4
  text "RESET" at 72.183,113.271 h2.5
  text "BOOT0" at 72.183,107.073 h2.5
  text "USB" at 139.519,107.062 h2.5
  text "LCD Interface" at 69.099,101.319 h2.5 r90
  text "1" at 68.301,97.892 h1 r90
  text "MicroSD" at 68.398,95.468 h2.5
  text "UART" at 139.019,95.048 h2.5
  text "GND" at 133.935,90.999 h2
  text "CLK" at 133.935,89.34 h2
  text "DIO" at 133.934,87.68 h2
  text "PC13" at 114.639,87.046 h2 r90
  text "PWR" at 116.434,87.046 h2 r90
  text "3V3" at 133.934,86.021 h2
  text "SWD" at 139.519,81.053 h2.5
  text "25" at 78.284,77.513 h1.5
  text "20" at 89.765,77.513 h1.5
  text "15" at 102.389,77.513 h1.5
  text "10" at 115.14,77.513 h1.5
  text "5" at 127.687,77.513 h1.5
Bottom Overlay:
  lines w0.254: 65.913,83.16 139.421,83.16 ; 65.913,116.561 139.421,116.561 ; 68.453,78.384 68.453,87.935 ; 68.453,111.785 68.453,121.336 ; 70.993,78.384 70.993,87.935 ; 70.993,111.785 70.993,121.336 ; 73.533,78.384 73.533,87.935 ; 73.533,111.785 73.533,121.336 ; 76.073,78.384 76.073,87.935 ; 76.073,111.785 76.073,121.336 ; 78.613,78.384 78.613,87.935 ; 78.613,111.785 78.613,121.336 ; 81.153,78.384 81.153,87.935 ; 81.153,111.785 81.153,121.336 ; 83.693,78.384 83.693,87.935 ; 83.693,111.785 83.693,121.336 ; 86.233,78.384 86.233,87.935 ; 86.233,111.785 86.233,121.336 ; 88.773,78.384 88.773,87.935 ; 88.773,111.785 88.773,121.336 ; 91.313,78.384 91.313,87.935 ; 91.313,111.785 91.313,121.336 ; 93.853,78.384 93.853,87.935 ; 93.853,111.785 93.853,121.336 ; 96.393,78.384 96.393,87.935 ; 96.393,111.785 96.393,121.336 ; 98.933,78.384 98.933,87.935 ; 98.933,111.785 98.933,121.336 ; 101.473,78.384 101.473,87.935 ; 101.473,111.785 101.473,121.336 ; 104.013,78.384 104.013,87.935 ; 104.013,111.785 104.013,121.336 ; 106.553,78.384 106.553,87.935 ; 106.553,111.785 106.553,121.336 ; 109.093,78.384 109.093,87.935 ; 109.093,111.785 109.093,121.336 ; 111.633,78.384 111.633,87.935 ; 111.633,111.785 111.633,121.336 ; 114.173,78.384 114.173,87.935 ; 114.173,111.785 114.173,121.336 ; 116.713,78.384 116.713,87.935 ; 116.713,111.785 116.713,121.336 ; 119.253,78.384 119.253,87.935 ; 119.253,111.785 119.253,121.336 ; 121.793,78.384 121.793,87.935 ; 121.793,111.785 121.793,121.336 ; 124.333,78.384 124.333,87.935 ; 124.333,111.785 124.333,121.336 ; 126.873,78.384 126.873,87.935 ; 126.873,111.785 126.873,121.336 ; 129.413,78.384 129.413,87.935 ; 129.413,111.785 129.413,121.336 ; 131.953,78.384 131.953,87.935 ; 131.953,111.785 131.953,121.336 ; 134.493,78.384 134.493,87.935 ; 134.493,111.785 134.493,121.336 ; 137.033,78.384 137.033,87.935 ; 137.033,111.785 137.033,121.336 ; 65.913,78.384 65.913,87.935 139.421,87.935 139.421,78.384 65.913,78.384 ; 65.913,111.785 139.421,111.785 139.421,121.336 65.913,121.336 65.913,111.785
  text "D12" at 69.164,117.145 h2.3 r270
  text "D13" at 71.724,117.145 h2.3 r270
  text "PC6" at 74.264,117.145 h2.3 r270
  text "PC8" at 76.804,117.145 h2.3 r270
  text "PE4" at 79.324,117.145 h2.3 r270
  text "PE5" at 81.884,117.145 h2.3 r270
  text "PA6" at 84.424,117.145 h2.3 r270
  text "H14" at 86.944,117.145 h2.3 r270
  text "PB8" at 92.044,117.145 h2.3 r270
  text "A10" at 94.584,117.145 h2.3 r270
  text "PI8" at 99.664,117.145 h2.3 r270
  text "C11" at 102.204,117.145 h2.3 r270
  text "PD2" at 104.724,117.145 h2.3 r270
  text "PD4" at 107.264,117.145 h2.3 r270
  text "PG9" at 109.824,117.145 h2.3 r270
  text "D11" at 112.344,117.145 h2.3 r270
  text "PC3" at 114.904,117.145 h2.3 r270
  text "PA0" at 117.444,117.145 h2.3 r270
  text "PH6" at 119.984,117.145 h2.3 r270
  text "PB0" at 122.524,117.145 h2.3 r270
  text "B10" at 125.064,117.145 h2.3 r270
  text "B12" at 127.584,117.145 h2.3 r270
  text "PB5" at 130.144,117.145 h2.3 r270
  text "PC0" at 132.684,117.145 h2.3 r270
  text "PH4" at 135.153,117.145 h2.2 r270
  text "GND" at 96.418,116.561 h2.3 r270
  text "GND" at 65.862,116.535 h2.3 r270
  text "GND" at 137.033,116.535 h2.2 r270
  text "GND" at 88.798,116.484 h2.3 r270
  text "PB7" at 69.164,112.471 h2.3 r270
  text "PH8" at 71.724,112.471 h2.3 r270
  text "A15" at 74.264,112.471 h2.3 r270
  text "PC7" at 76.804,112.471 h2.3 r270
  text "PC9" at 79.344,112.471 h2.3 r270
  text "PI4" at 81.864,112.471 h2.3 r270
  text "PE6" at 84.424,112.471 h2.3 r270
  text "PI3" at 86.964,112.471 h2.3 r270
  text "PB9" at 92.044,112.471 h2.3 r270
  text "PA9" at 94.584,112.471 h2.3 r270
  text "PE2" at 97.104,112.471 h2.3 r270
  text "PE3" at 99.664,112.471 h2.3 r270
  text "C10" at 102.204,112.471 h2.3 r270
  text "C12" at 104.744,112.471 h2.3 r270
  text "PD3" at 107.284,112.471 h2.3 r270
  text "PD5" at 109.824,112.471 h2.3 r270
  text "PG3" at 112.364,112.471 h2.3 r270
  text "PC2" at 114.904,112.471 h2.3 r270
  text "PA4" at 117.424,112.471 h2.3 r270
  text "PH7" at 119.964,112.471 h2.3 r270
  text "PA3" at 122.524,112.471 h2.3 r270
  text "PB1" at 125.044,112.471 h2.3 r270
  text "B11" at 127.584,112.471 h2.3 r270
  text "B13" at 130.144,112.471 h2.3 r270
  text "PA5" at 132.684,112.471 h2.3 r270
  text "PI11" at 135.153,112.471 h2.2 r270
  text "3V3" at 65.837,111.811 h2.3 r270
  text "5V" at 137.058,111.811 h2.2 r270
  text "3V3" at 88.773,111.76 h2.3 r270
  text "B15" at 66.517,83.744 h2.3 r270
  text "PD6" at 69.057,83.744 h2.3 r270
  text "PB4" at 71.577,83.744 h2.3 r270
  text "G14" at 74.137,83.744 h2.3 r270
  text "G13" at 76.677,83.744 h2.3 r270
  text "PC5" at 79.217,83.744 h2.3 r270
  text "PC1" at 81.757,83.744 h2.3 r270
  text "PA2" at 84.277,83.744 h2.3 r270
  text "PF0" at 89.377,83.744 h2.3 r270
  text "PF1" at 91.897,83.744 h2.3 r270
  text "PF2" at 94.437,83.744 h2.3 r270
  text "PF3" at 96.997,83.744 h2.3 r270
  text "PG0" at 99.537,83.744 h2.3 r270
  text "PG5" at 102.077,83.744 h2.3 r270
  text "PG4" at 104.617,83.744 h2.3 r270
  text "F11" at 107.137,83.744 h2.3 r270
  text "PH3" at 109.697,83.744 h2.3 r270
  text "G15" at 112.237,83.744 h2.3 r270
  text "PH5" at 114.777,83.744 h2.3 r270
  text "PE0" at 117.317,83.744 h2.3 r270
  text "E10" at 119.857,83.744 h2.3 r270
  text "PE9" at 122.397,83.744 h2.3 r270
  text "PE8" at 124.937,83.744 h2.3 r270
  text "PE7" at 127.457,83.744 h2.3 r270
  text "PD1" at 129.997,83.744 h2.3 r270
  text "PD0" at 132.557,83.744 h2.3 r270
  text "D15" at 135.045,83.617 h2.2 r270
  text "D14" at 137.566,83.617 h2.2 r270
  text "RST" at 86.258,83.16 h2.3 r270
  text "B14" at 66.497,78.943 h2.3 r270
  text "PD7" at 69.037,78.943 h2.3 r270
  text "PB3" at 71.597,78.943 h2.3 r270
  text "G11" at 74.137,78.943 h2.3 r270
  text "PC4" at 76.677,78.943 h2.3 r270
  text "PA7" at 79.197,78.943 h2.3 r270
  text "PA1" at 81.737,78.943 h2.3 r270
  text "REF" at 86.817,78.943 h2.3 r270
  text "PF4" at 91.897,78.943 h2.3 r270
  text "PF5" at 94.457,78.943 h2.3 r270
  text "F12" at 96.977,78.943 h2.3 r270
  text "F13" at 99.537,78.943 h2.3 r270
  text "F14" at 102.057,78.943 h2.3 r270
  text "F15" at 104.617,78.943 h2.3 r270
  text "PG1" at 107.157,78.943 h2.3 r270
  text "PG2" at 109.697,78.943 h2.3 r270
  text "PH2" at 112.217,78.943 h2.3 r270
  text "PG8" at 114.777,78.943 h2.3 r270
  text "PE1" at 117.297,78.943 h2.3 r270
  text "E11" at 119.837,78.943 h2.3 r270
  text "E12" at 122.377,78.943 h2.3 r270
  text "E13" at 124.937,78.943 h2.3 r270
  text "E14" at 127.457,78.943 h2.3 r270
  text "E15" at 130.017,78.943 h2.3 r270
  text "PD8" at 132.557,78.943 h2.3 r270
  text "PD9" at 135.045,78.816 h2.2 r270
  text "D10" at 137.585,78.816 h2.2 r270
  text "BAT" at 83.718,78.41 h2.3 r270
  text "GND" at 88.798,78.41 h2.3 r270

## Text inside footprints (layer, text, board x,y; h text height)
P1: Top Overlay "1" at 74.651,84.305 h0.76 r270; Top Overlay "2" at 74.676,85.397 h0.76 r270; Top Overlay "3" at 74.676,86.464 h0.76 r270; Top Overlay "4" at 74.676,87.657 h0.76 r270; Top Overlay "5" at 74.701,88.724 h0.76 r270; Top Overlay "6" at 74.701,89.791 h0.76 r270; Top Overlay "7" at 74.701,90.858 h0.76 r270; Top Overlay "8" at 74.727,91.975 h0.76 r270; Top Overlay "Cd" at 75.286,93.322 h0.76 r180